# Altium PCB PT100.PcbDoc
Units mil, origin at the board's own origin, x right, y up, seen from the top; angles counter-clockwise.
Board outline 3950 x 2000 mil, 2 copper layers (Top Layer, Bottom Layer); 14 components, 12 nets, 42 pads, 0 vias.
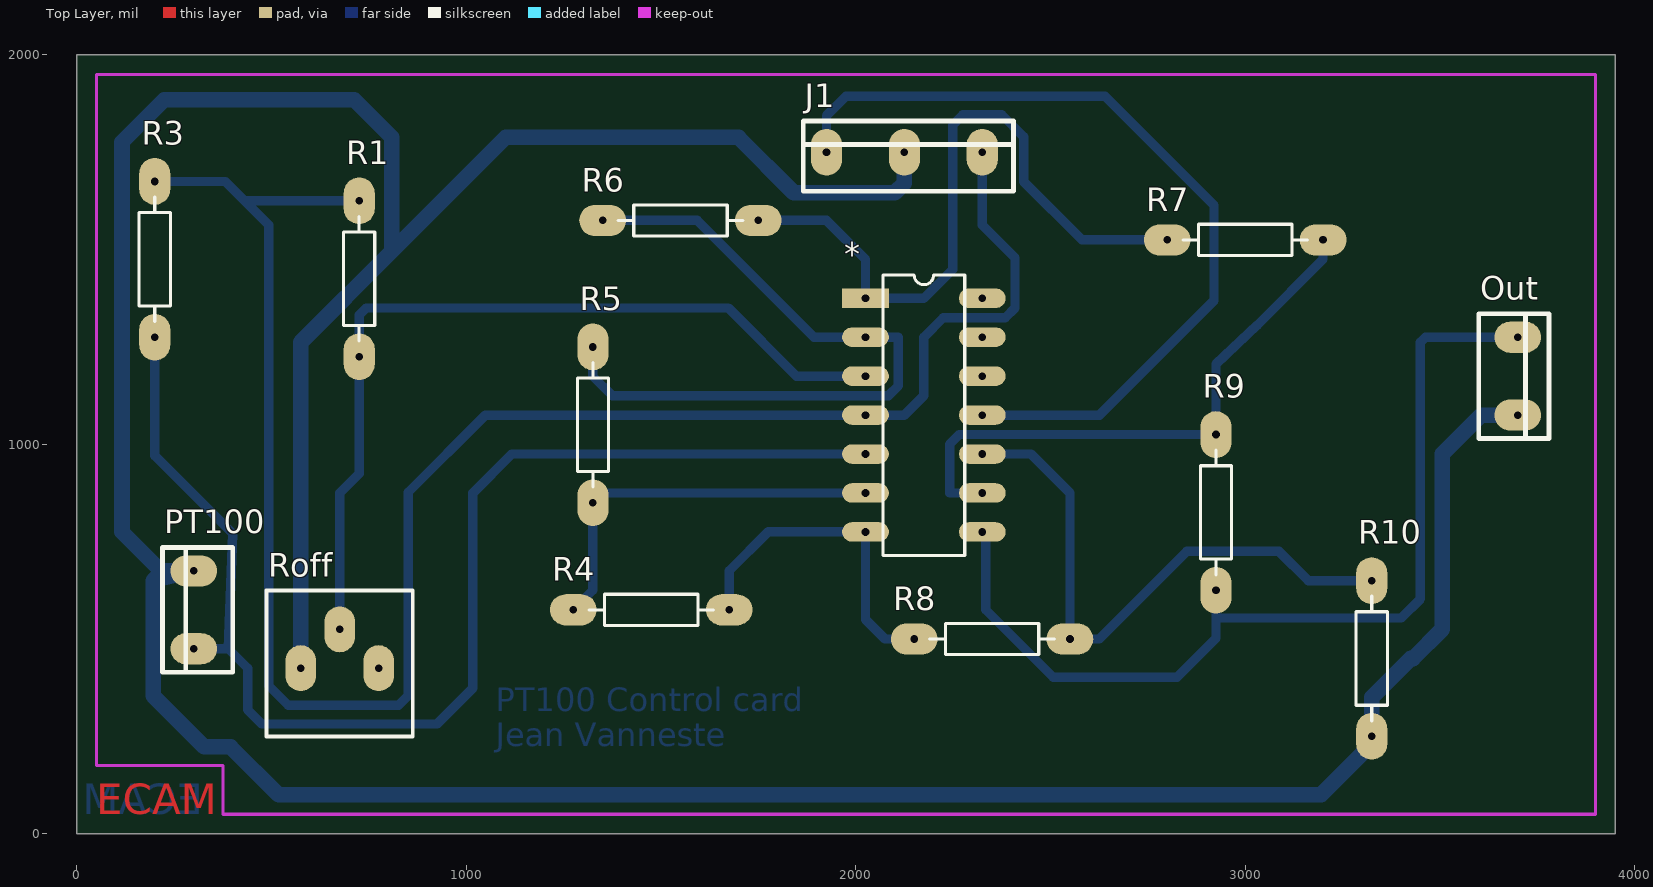
[diagram p0: Top Layer view]
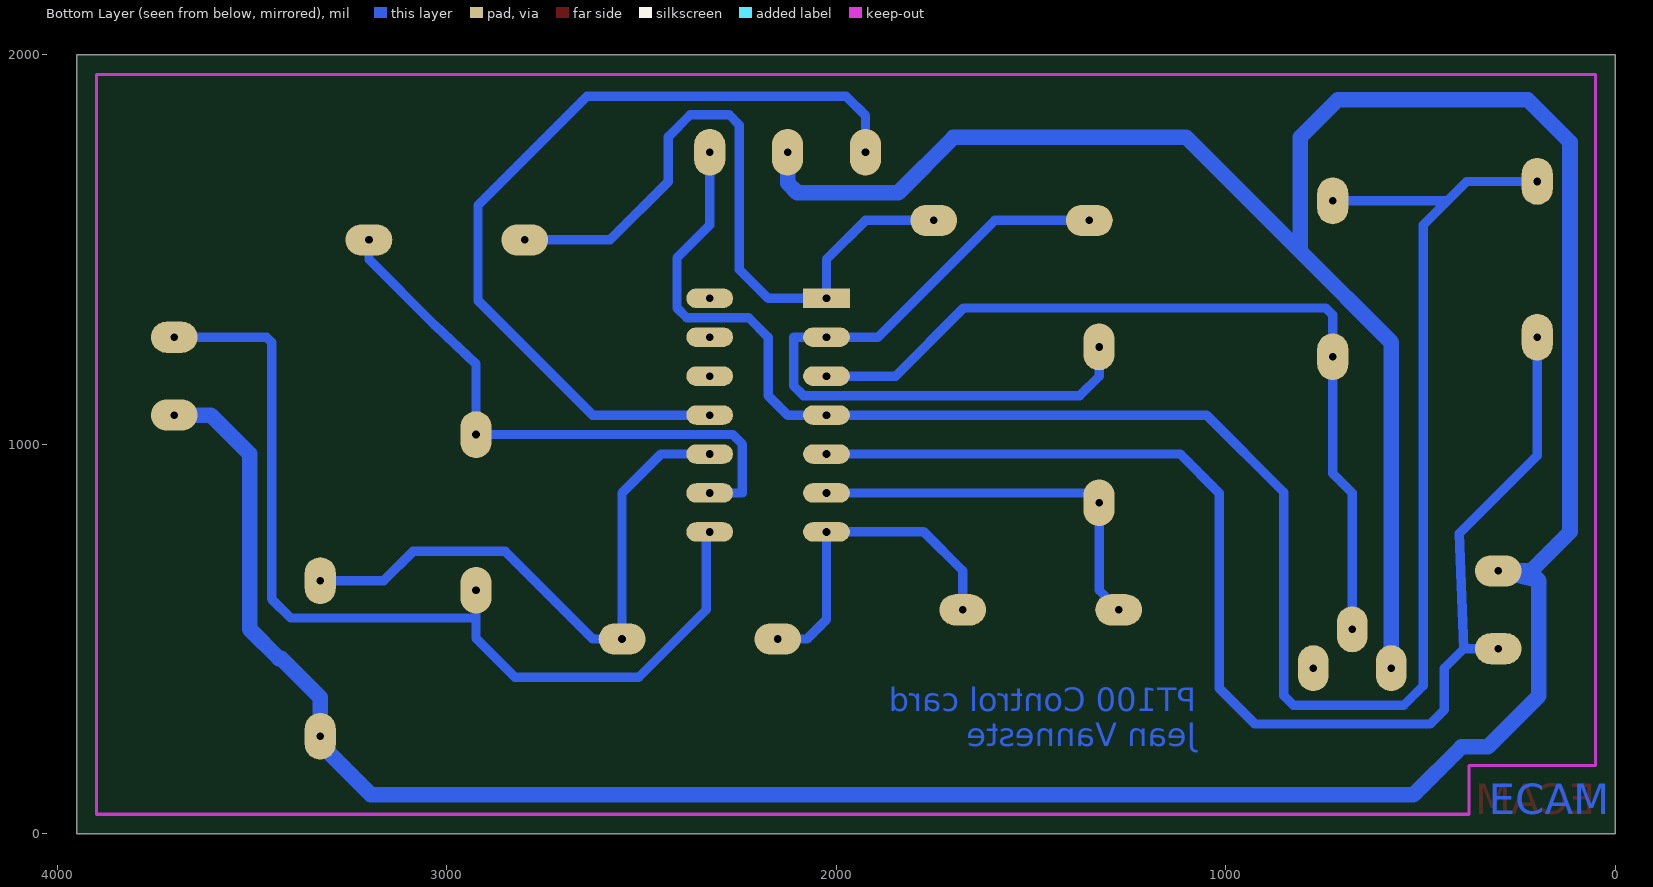
[diagram p1: Bottom Layer view, seen from below]

## Layer stack, top to bottom
Top Solder: solder mask 0.4, Solder Resist, Dk 3.5
Top Layer: signal copper 1.4
Dielectric1: core 12.6, FR-4, Dk 4.8
Bottom Layer: signal copper 1.4
Bottom Solder: solder mask 0.4, Solder Resist, Dk 3.5

## Board outline
0,0 0,2000 3950,2000 3950,0

## Design rules (kind name [scope] priority, off if disabled: settings)
Clearance "Clearance P DIP" [(IsTrack) vs (IsPad AND( HasFootprint('DIP*')))] p1: gap=12 ignorepadtopadclearanceinfootprint=FALSE except(0: Arc-Hole Track-Hole SMDPad-Hole THPad-Hole Via-Hole Fill-Hole Poly-Hole Region-Hole Text-Hole)
Clearance "Clearance PT" [(isTrack) vs (isPad)] p2: gap=24 ignorepadtopadclearanceinfootprint=FALSE except(0: Arc-Hole Track-Hole SMDPad-Hole THPad-Hole Via-Hole Fill-Hole Poly-Hole Region-Hole Text-Hole)
Clearance "Clearance TT" [(isTrack) vs (isTrack)] p3: gap=24 ignorepadtopadclearanceinfootprint=FALSE except(0: Arc-Hole Track-Hole SMDPad-Hole THPad-Hole Via-Hole Fill-Hole Poly-Hole Region-Hole Text-Hole)
Clearance "Clearance PP" [(IsPad) vs (IsPad)] p4: gap=24 ignorepadtopadclearanceinfootprint=FALSE except(0: Arc-Hole Track-Hole SMDPad-Hole THPad-Hole Via-Hole Fill-Hole Poly-Hole Region-Hole Text-Hole)
Clearance [All] p5: gap=10 ignorepadtopadclearanceinfootprint=FALSE
FabricationTestPointUsage TestPointUsage [All] p1: valid=0 allowmultiple=FALSE
FabricationTestpoint Testpoint [All] p1: side=3 testpointundercomponent=TRUE minsize=40 maxsize=100 preferedsize=60 minholesize=0 maxholesize=40 preferedholesize=32 testpointgrid=1 allowsidetop=TRUE allowsidebottom=TRUE usegrid=TRUE gridtolerance=0.01
HoleSize [All] p1: absolutevalues=TRUE maxlimit=21.65 minlimit=17.72 maxpercent=80.000 minpercent=20.000
PolygonConnect [All] p1: connectstyle=Relief reliefconductorwidth=10 reliefentries=4 polygonreliefangle="90 Angle" airgapwidth=10
RoutingCorners [All] p1: cornerstyle=45-Degree minsetback=100 maxsetback=1000
RoutingLayers [All] p1: top layer_v5=FALSE bottom layer_v5=TRUE
RoutingVias "ECAM Vias" [All] p1: holewidth=19.68 width=80 viastyle="Through Hole" minholewidth=17.72 minwidth=60 maxholewidth=21.65 maxwidth=120
SolderMaskExpansion [All] p1: expansion=4
Width Width_GND [InNet('GND')] p1: maxlimit=1000 minlimit=24 preferedwidth=40
Width Width_VCC [InNet('VCC')] p2: maxlimit=1000 minlimit=24 preferedwidth=40
Width [All] p3: maxlimit=1000 minlimit=16 preferedwidth=24
25 further rules are at their usual default settings.

## Components (designator, comment, footprint, x,y, rotation, side; value= is the part's Value field where it differs from the comment)
* "LM324" DIP14 2025,1375 r270 top
J1 "Connecteur 3" ALIM3 1925,1750 r0 top
Out "Connecteur 2" ALIM2 3700,1275 r270 top
PT100 "Connecteur 2" ALIM2 300,475 r90 top
R1 "3.3k" AXIAL-0.4 725,1225 r90 top
R3 "3.3k" AXIAL-0.4 200,1275 r90 top
R4 "3.9k" AXIAL-0.4 1675,575 r180 top
R5 "1.229k" AXIAL-0.4 1325,850 r90 top
R6 "3.9k" AXIAL-0.4 1350,1575 r0 top
R7 "8.2k" AXIAL-0.4 2800,1525 r0 top
R8 "8.2k" AXIAL-0.4 2150,500 r0 top
R9 "47k" AXIAL-0.4 2925,1025 r270 top
R10 "47k" AXIAL-0.4 3325,250 r90 top
Roff "80" VARRES 675,525 r180 top

## Footprints (in the part's own frame and the unit in brackets; to place one, negate y for a bottom-side part, rotate by r counter-clockwise, add the part's x,y. Pads: shape width x height; smd on the part's side, far side on the other; paste and mask are expansions set on the pad)
ALIM2 [mil]
  oval 80x120 hole 19.68: 1(0,0) 2(200,0)
  silkscreen extent -60,-100 260,80
ALIM3 [mil]
  oval 80x120 hole 19.68: 1(0,0) 2(200,0) 3(400,0)
  silkscreen extent -60,-100 480,80
AXIAL-0.4 [mil] "Resistor; 2 Leads"
  oval 120x80 hole 19.68: 1(0,0) 2(400,0)
  silkscreen extent 40,-40 360,40
DIP14 [mil] "DIP; 14 Leads; Row Spacing 7.62 mm; Pitch 2.54 mm"
  rect 50x120 hole 19.68: 1(0,0)
  oval 50x120 hole 19.68: 2(100,0) 3(200,0) 4(300,0) 5(400,0) 6(500,0) 7(600,0) 8(600,300) 9(500,300) 10(400,300) 11(300,300) 12(200,300) 13(100,300) 14(0,300)
  silkscreen extent -60,45 660,255
VARRES [mm]
  oval 2x3 hole 0.5: 1(0,0) 2(-2.54,2.54) 3(2.54,2.54)
  silkscreen extent -4.76,-2.54 4.76,6.99

## Part data
*: "4 Ampli Op"
J1 Out PT100: "Connecteur", Type="Connecteur à vis"
  J1: Designer="ECAM 2004"
  Out PT100: Designer="ECAM 2005"
R1 R3 R4 R5 R6 R7 R8 R9 R10: library part Résistance, "Résistance standard", Designer="ECAM 2005", Type="Résistance standard"
Roff: library part Potentiomètre, "Potentiomètre", Designer="ECAM 2002", Set Position=0.5, Type="Résistance variable"

## Nets (pads, with @x,y where several pads share a name; then routed paths per layer and width w, separated by ;. In a path a pad name is that pad's centre, name@x,y a point inside that pad or via, vN(x,y) a via of type N, cw(c..) or ccw(c..) an arc to the next point about the centre after c; other vN are vias at no path point)
+6V: *.4 J1.3 R1.2 R3.2 | length 5004.1
  Bottom Layer w24: R3.2 381,1675 431,1625 ; R1.2 431,1625 ; J1.3 2325,1563 2409,1479 2409,1350 2384,1325 2225,1325 2175,1275 2175,1125 2125,1075 *.4 1049,1075 851,877 851,355 825.94,329.94 543.02,329.94 493,379.96 493,1563 431,1625
-6V: *.11 J1.1 | length 2187.5
  Bottom Layer w24: J1.1 1925,1844 1975,1894 2640,1894 2920,1614 2920,1369 2626,1075 *.11
GND: J1.2 Out.2 PT100.2 R10.1 Roff.3 | length 9833.6
  Bottom Layer w40: Roff.3 575,1262 809,1496 ; J1.2 2125,1671 2100,1646 1841,1646 1699,1788 1101,1788 809,1496 ; Out.2 3606,1075 3506,975 3506,525 3431,450 3425,450 3325,350 R10.1 3325,230 3195,100 517.88,100 394.88,223 327,223 196,354 196,650 ; 196,650 218.5,672.5 ; 196,650 PT100.2 221,675 218.5,672.5 ; 218.5,672.5 116,775 116,1776 225,1885 712,1885 809,1788 809,1496
Net*_1: *.1 R6.2 R7.1 | length 1804.2
  Bottom Layer w24: R6.2 1925,1575 2025,1475 *.1 2175,1375 2249,1449 2249,1820 2275,1846 2375,1846 2431,1790 2431,1675 2581,1525 R7.1
Net*_2: *.2 R5.2 R6.1 | length 1898.3
  Bottom Layer w24: R5.2 1325,1175 1375,1125 2084,1125 2109,1150 2109,1275 *.2 1893,1275 1593,1575 R6.1
Net*_3: *.3 R1.1 Roff.1 | length 2207.7
  Bottom Layer w24: Roff.1 675,875 725,925 R1.1 725,1332 743,1350 1673,1350 1848,1175 *.3
Net*_5: *.5 PT100.1 R3.1 | length 3331.3
  Bottom Layer w24: R3.1 200,971 400,771 389,475 ; PT100.1 389,475 ; *.5 1117,975 1017,875 1017,373.94 925,281.94 475,281.94 439,317.94 439,425 389,475
Net*_6: *.6 R4.2 R5.1 | length 1020.7
  Bottom Layer w24: R4.2 1325,625 R5.1 1325,875 *.6
Net*_7: *.7 R4.1 R8.1 | length 862.1
  Bottom Layer w24: R4.1 1675,675 1775,775 *.7 2025,550 2075,500 R8.1
Net*_8: *.8 Out.1 R9.2 | length 2495.8
  Bottom Layer w24: *.8 2334,775 2334,575 2507,402 2825,402 2925,502 2925,554 ; R9.2 2925,554 ; Out.1 3463,1275 3450,1262 3450,603 3401,554 2925,554
Net*_9: *.9 R7.2 R9.1 | length 1519.1
  Bottom Layer w24: *.9 2241,875 2241,1000 2266,1025 R9.1 2925,1206 3031,1306 3200,1475 R7.2
Net*_10: *.10 R8.2 R10.2 | length 1540.7
  Bottom Layer w24: *.10 2450,975 2550,875 R8.2 2625,500 2850,725 3087,725 3162,650 R10.2
pads on no net: *.12 *.13 *.14 Roff.2

## Keep-outs
Keep-Out Layer:
  lines w8: 50,175 375,175 375,50 3900,50 3900,1950 50,1950 50,175

## Other copper
Top Layer:
  text "ECAM" at 50,50 h78.74
  text ".GTL" at 6764,-2628 h90
Bottom Layer:
  text "PT100 Control card / Jean Vanneste" at 1075,225 h60
  text "ECAM" at 325,50 h78.74
  text ".GBL" at 6764,-2628 h90
Multi-Layer:

## Silkscreen, mask and mechanical layers (free items; w line width, h text height)
Top Overlay:
  text ".GTO" at 6764,-2628 h90
Top Paste:
  text ".GTP" at 6764,-2628 h90
Bottom Paste:
  text ".GBP" at 6764,-2628 h90
Top Solder:
  text ".GTS" at 6764,-2628 h90
Bottom Solder:
  text ".GBS" at 6764,-2628 h90
Mechanical 1:
  the board outline again, w7.87
Mechanical 16:
  circle w3.94: c5670,-2615 r55.12
  lines w5: -3175,-1325 -2975,-1325 ; -3175,575 -2975,575 ; -3175,2475 -2975,2475 ; -695,-3225 -695,-3025 ; -695,4175 -695,4375 ; 2180,-3225 2180,-3025 ; 2180,4175 2180,4375 ; 2815,-2725 7315,-2725 ; 2815,-2425 7315,-2425 ; 2815,-2125 4315,-2125 ; 4315,-3025 4315,-2425 4315,-1825 ; 5055,-3225 5055,-3025 ; 5055,4175 5055,4375 ; 6415,-3025 6415,-2425 ; 7315,-1335 7515,-1335 ; 7315,565 7515,565 ; 7315,2465 7515,2465 ; 2815,-3025 1415,-3025 1415,-1825 2815,-1825 ; 2815,-3025 7315,-3025 ; 2815,-3025 2815,-1825 ; 2815,-1825 4315,-1825 ; 4315,-1825 7315,-1825 7315,-3025 ; 7315,-3025 7315,4175 -2975,4175 -2975,-3025 7315,-3025 ; -3175,-3225 -3175,4375 7515,4375 7515,-3225 -3175,-3225
  text "1" at -2143,4240 h70
  text "2" at 717,4240 h70
  text "3" at 3597,4240 h70
  text "4" at 6467,4240 h70
  text "A" at -3100,3334 h70
  text "A" at 7390,3324 h70
  text "B" at -3100,1442 h70
  text "B" at 7390,1432 h70
  text "C" at -3100,-468 h70
  text "C" at 7390,-478 h70
  text "Concepteur du circuit :" at 2865,-1925 h45
  text "TITRE :" at 4365,-1925 h45
  text "Roboro" at 3240,-2075 h80
  text "PT100 control card" at 4625,-2195 h100
  text "Concepteur du PCB :" at 2865,-2220 h45
  text "ECAM" at 1650,-2235 h240
  text "D" at -3100,-2358 h70
  text "D" at 7390,-2368 h70
  text "Jean Vanneste" at 3235,-2380 h80
  text "Prom. de l'Alma, 50" at 1575,-2475 h60
  text "Date :" at 2865,-2525 h45
  text "PART NO.:" at 4365,-2525 h45
  text "Layer :" at 6465,-2525 h45
  text ".Print_Date" at 3255,-2560 h70
  text "1" at 4370,-2645 h60
  text "C" at 5645,-2645 h60
  text "ECAM" at 5751,-2660 h100
  text ".Print_Time" at 3260,-2690 h70
  text "1200 Bruxelles" at 1720,-2725 h60
  text "Nom du fichier :" at 2865,-2825 h45
  text "DWG NO:" at 4365,-2825 h45
  text ".Print_Scale" at 6625,-2905 h40
  text ".Printout_Name" at 4515,-2940 h60
  text ".Pcb_File_Name_No_Path" at 2915,-2945 h70
  text "1" at -2143,-3160 h70
  text "2" at 717,-3160 h70
  text "3" at 3597,-3160 h70
  text "4" at 6467,-3160 h70